# EAGLE board Rapide13 (EAGLE 6.3)
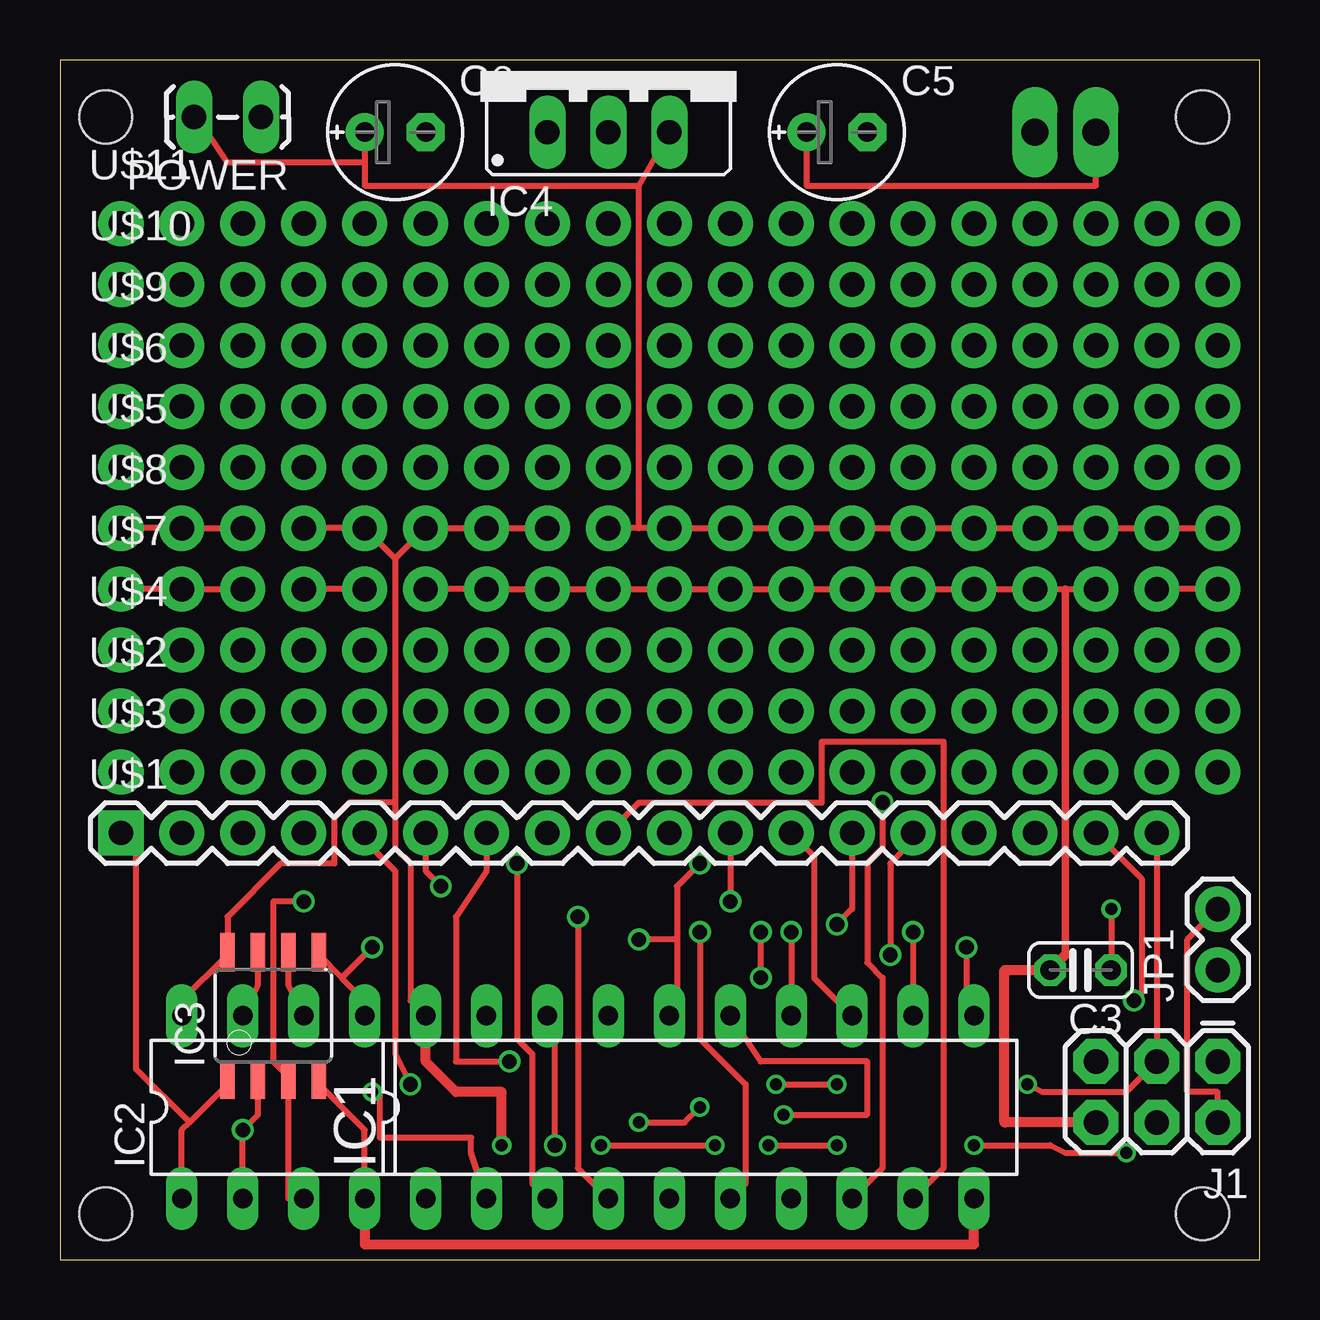
[diagram p0: board, top side]
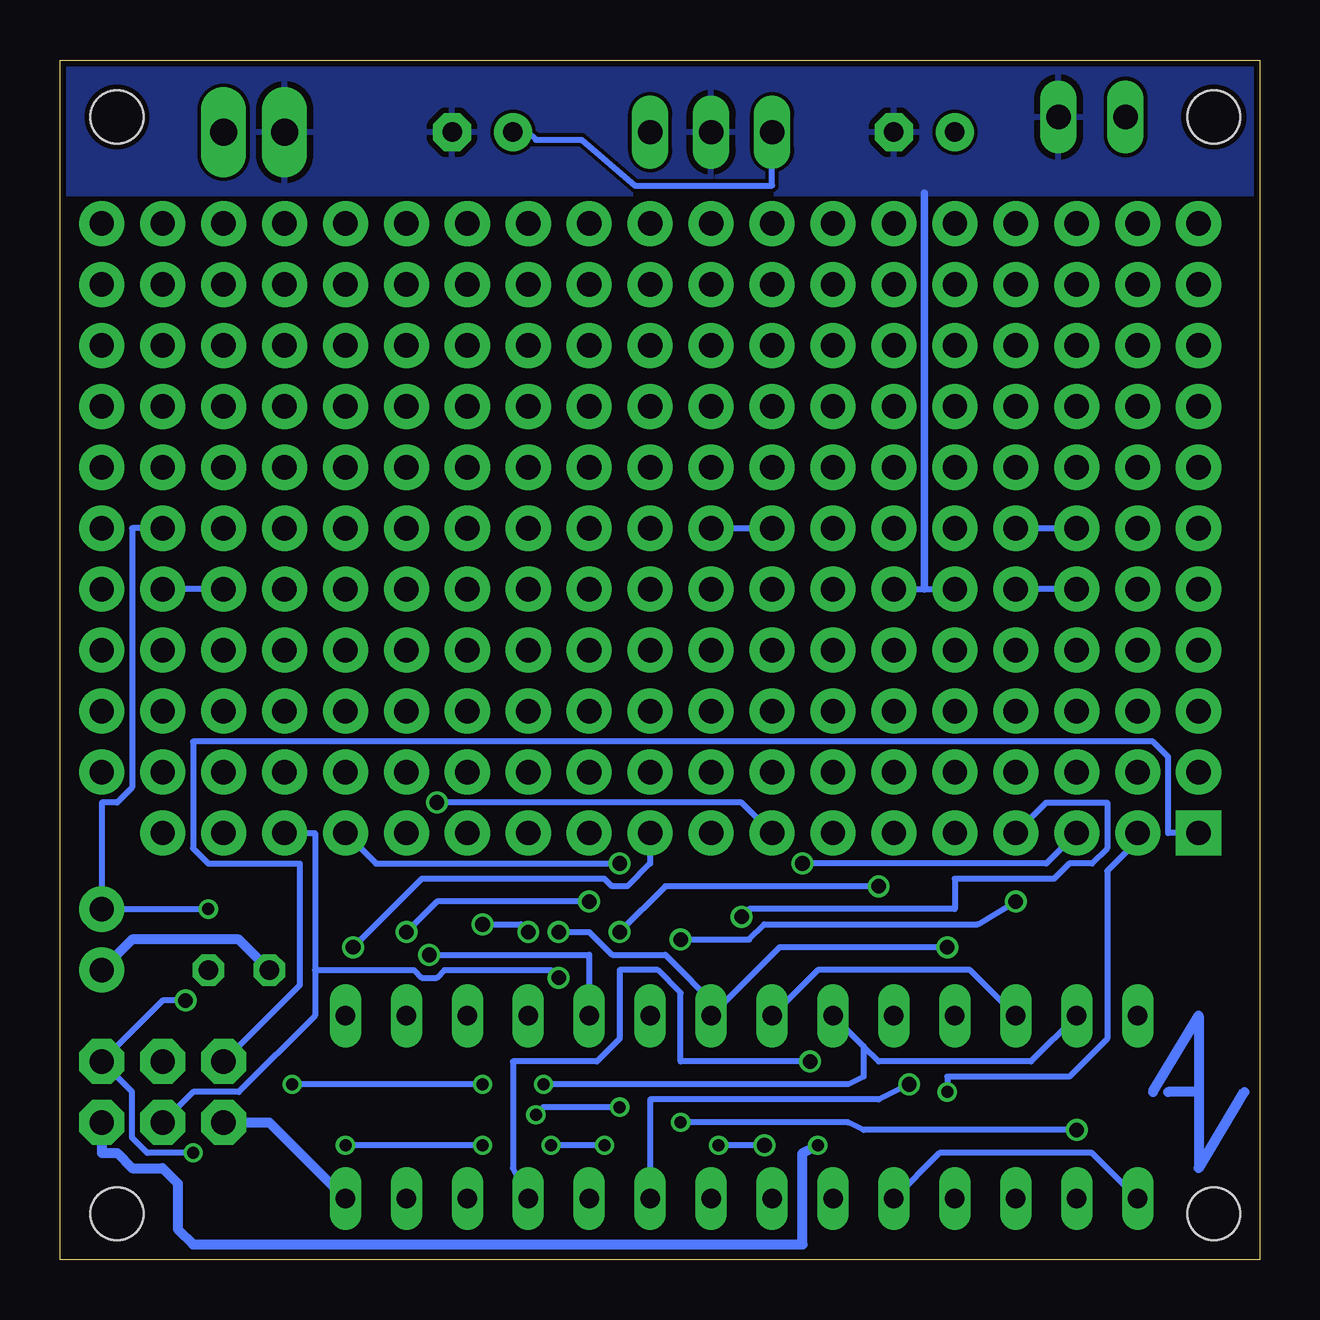
[diagram p1: board, bottom side, seen from below]

Size 50 x 50 mm. Coordinates in mm from the lower left corner, seen from the top.
Outline: 0,0 50,0 50,50 0,50 0,0
Copper layers (1*16): Top 0.035mm / dielectric 1.5mm / Bottom 0.035mm
Design rules "Fusion_eagle_rule_v1.1": minimum track width 6mil, minimum drill 12mil, track to track 6mil, track to pad 6mil, pad to pad 6mil, via to via 6mil, smd to smd 0mil, copper to edge 10mil, drill to drill 10mil, minimum pad ring 10mil, minimum via ring 6mil, stop-mask expansion 2mil, vias tented up to drill 100mil, thermal gap 10mil
Holes 2.2 mm at 1.91,1.91 47.62,1.91 47.62,47.62 1.91,47.62

## Footprints (pad centres in the part's own frame; a part is rotated, then mirrored left to right if it is on the bottom)
C025-024X044 = drill 0.813 octagon: 1 -1.27,0; 2 1.27,0
E2,5-6E = drill 0.813 pad 1.575: + -1.27,0 | drill 0.813 pad 1.575 octagon: - 1.27,0
DIL20 = drill 0.813 long: 1 -11.43,-3.81; 2 -8.89,-3.81; 3 -6.35,-3.81; 4 -3.81,-3.81; 5 -1.27,-3.81; 6 1.27,-3.81; 7 3.81,-3.81; 8 6.35,-3.81; 9 8.89,-3.81; 10 11.43,-3.81; 11 11.43,3.81; 12 8.89,3.81; 13 6.35,3.81; 14 3.81,3.81; 15 1.27,3.81; 16 -1.27,3.81; 17 -3.81,3.81; 18 -6.35,3.81; 19 -8.89,3.81; 20 -11.43,3.81
DIL08 = drill 0.813 long: 1 -3.81,-3.81; 2 -1.27,-3.81; 3 1.27,-3.81; 4 3.81,-3.81; 5 3.81,3.81; 6 1.27,3.81; 7 -1.27,3.81; 8 -3.81,3.81
8S1 = smd 0.6 x 1.6: 1 -1.905,-2.654; 2 -0.645,-2.654; 3 0.625,-2.654; 4 1.895,-2.654; 5 1.905,2.654; 6 0.635,2.654; 7 -0.635,2.654; 8 -1.905,2.654
78XXS = drill 1.016 long: GND 0,-2.54; IN -2.54,-2.54; OUT 2.54,-2.54
2X3 = drill 1.016 pad 1.88 octagon: 1 0,0; 2 0,2.54; 3 2.54,0; 4 2.54,2.54; 5 5.08,0; 6 5.08,2.54
1X02 = drill 1.016 pad 1.88: 1 0,0; 2 2.54,0
1X02_LOCK_LONGPADS = drill 1.016 long: 1 -0.127,0; 2 2.667,0
1X18 = drill 1.016 pad 1.88 square: 1 0,0 | drill 1.016 pad 1.88: 2 2.54,0; 3 5.08,0; 4 7.62,0; 5 10.16,0; 6 12.7,0; 7 15.24,0; 8 17.78,0; 9 20.32,0; 10 22.86,0; 11 25.4,0; 12 27.94,0; 13 30.48,0; 14 33.02,0; 15 35.56,0; 16 38.1,0; 17 40.64,0; 18 43.18,0
1X19_NO_SILK = drill 1.016 pad 1.88: 1 0,0; 2 2.54,0; 3 5.08,0; 4 7.62,0; 5 10.16,0; 6 12.7,0; 7 15.24,0; 8 17.78,0; 9 20.32,0; 10 22.86,0; 11 25.4,0; 12 27.94,0; 13 30.48,0; 14 33.02,0; 15 35.56,0; 16 38.1,0; 17 40.64,0; 18 43.18,0; 19 45.72,0
1X02_LONGPADS = drill 1.118 pad 1.88 long: 1 0,0; 2 2.54,0

## Placement (x,y rotation side)
C3  [C025-024X044]  42.55,12.06 180 top
C5  47u  [E2,5-6E]  32.38,46.99 0 top
C6  4.7u  [E2,5-6E]  13.97,46.99 0 top
IC1  AT90S2313P  [DIL20]  26.67,6.35 0 top
IC2  TINY13-20PU  [DIL08]  8.89,6.35 0 top
IC3  TINY13-20SSU  [8S1]  8.89,10.16 0 top
IC4  [78XXS]  22.86,49.53 0 top
J1  AVR_SPI_PRG_6PTH  [2X3]  48.26,8.26 180 top
JP1  [1X02]  48.26,12.06 90 top
POWER  [1X02_LOCK_LONGPADS]  8.26,47.62 180 top
U$1  M18_  [1X18]  2.54,17.78 0 top
U$2  M191X19_NO_SILK  [1X19_NO_SILK]  2.54,22.86 0 top
U$3  M191X19_NO_SILK  [1X19_NO_SILK]  2.54,20.32 0 top
U$4  M191X19_NO_SILK  [1X19_NO_SILK]  2.54,25.4 0 top
U$5  M191X19_NO_SILK  [1X19_NO_SILK]  2.54,33.02 0 top
U$6  M191X19_NO_SILK  [1X19_NO_SILK]  2.54,35.56 0 top
U$7  M191X19_NO_SILK  [1X19_NO_SILK]  2.54,27.94 0 top
U$8  M191X19_NO_SILK  [1X19_NO_SILK]  2.54,30.48 0 top
U$9  M191X19_NO_SILK  [1X19_NO_SILK]  2.54,38.1 0 top
U$10  M191X19_NO_SILK  [1X19_NO_SILK]  2.54,40.64 0 top
U$11  M191X19_NO_SILK  [1X19_NO_SILK]  2.54,43.18 0 top
UNREGULATED  [1X02_LONGPADS]  40.64,46.99 0 top

## Library data of the parts
C3 C5 C6 = resistor
IC1 = atmel; OC_FARNELL: unknown; OC_NEWARK: unknown
IC2 = atmel; MPN: ATTINY13-20PU; OC_FARNELL: 9171550; OC_NEWARK: 96K6521
IC3 = atmel; MPN: ATTINY13-20SSU; OC_FARNELL: 1455133; OC_NEWARK: 58M3771
IC4 = v-reg
J1 POWER U$1 UNREGULATED = SparkFun
JP1 U$2-U$11 = SparkFun-Connectors

## Nets
GND: C3.2 C5.- C6.- IC1.10 IC2.4 IC3.4 IC4.GND J1.6 JP1.1 POWER.1 U$7.1 U$7.2 U$7.3 U$7.4 U$7.5 U$7.6 U$7.7 U$7.8 U$7.9 U$7.10 U$7.11 U$7.12 U$7.13 U$7.14 U$7.15 U$7.16 U$7.17 U$7.18 U$7.19 UNREGULATED.1
MISO: IC1.18 IC2.6 IC3.6 J1.1 U$1.17
MOSI: IC1.17 IC2.5 IC3.5 J1.4 U$1.16
N$1: IC1.4 U$1.4
N$2: IC1.5 U$1.5
N$3: IC1.2 U$1.2
N$4: IC1.3 U$1.3
N$5: IC1.6 U$1.6
N$6: IC1.7 U$1.7
N$7: IC1.8 U$1.8
N$8: IC1.9 U$1.9
N$9: IC1.11 U$1.10
N$10: IC1.12 U$1.11
N$11: IC1.13 U$1.12
N$12: IC1.14 U$1.13
RESET: IC1.1 IC2.1 IC3.1 J1.5 U$1.1
SCK: IC1.19 IC2.7 IC3.7 J1.3 U$1.18
TINY13_B3: IC1.15 IC2.2 IC3.2 U$1.14
TINY13_B4: IC1.16 IC2.3 IC3.3 U$1.15
VCC: C3.1 C6.+ IC1.20 IC2.8 IC3.8 IC4.OUT J1.2 JP1.2 POWER.2 U$8.1 U$8.2 U$8.3 U$8.4 U$8.5 U$8.6 U$8.7 U$8.8 U$8.9 U$8.10 U$8.11 U$8.12 U$8.13 U$8.14 U$8.15 U$8.16 U$8.17 U$8.18 U$8.19
VIN: C5.+ IC4.IN UNREGULATED.2

## Tracks (layer width: path | path; a pad name or v marks a point on that pad's centre or on a via)
GND
  Top 0.254: U$7.5 U$7.4 | IC2.4 12.7,5.4 10.79,7.3 IC3.4 | U$7.1 U$7.2 U$7.3 | U$7.19 U$7.18 | U$7.6 U$7.7 U$7.8 U$7.9 U$7.10 U$7.11 U$7.12 U$7.13 U$7.14 U$7.15 U$7.16 41.91,27.94 U$7.17
  Top 0.305: 41.91,27.94 41.91,12.7
  Top 0.406: J1.6 39.37,5.71 39.37,12.06 C3.2 41.91,12.7 | IC2.4 12.7,0.64 38.1,0.64 IC1.10
  Bottom 0.254: U$7.3 U$7.4 | U$7.17 U$7.18 | U$7.6 13.97,27.94 U$7.5
  Bottom 0.305: 13.97,27.94 13.97,44.45
  Bottom 0.406: IC1.10 41.27,5.71 J1.6 | JP1.1 46.99,13.34 42.55,13.34 C3.2
  pour Bottom: -1.91,52.07 52.7,52.07 52.7,44.45 -1.91,44.45
MISO  (via drill 0.5, 0.61)
  Top 0.254: IC3.6 9.53,11.43 IC2.6 | v44.77,10.79 45.09,11.11 45.09,15.88 U$1.17 | IC1.18 20.64,9.21 v20.64,4.76 | v22.54,4.76 v27.3,4.76 | v29.53,4.76 v32.38,4.76 | v38.1,4.76 41.27,4.76 41.91,4.45 v44.45,4.45
  Bottom 0.254: IC1.18 18.41,12.06 12.06,12.06 IC2.6 | v44.77,10.79 45.72,10.79 J1.1 46.99,6.99 46.99,5.08 46.35,4.45 v44.45,4.45 | v20.64,4.76 v22.54,4.76 | v27.3,4.76 v29.53,4.76 | v32.38,4.76 v38.1,4.76
MOSI  (via drill 0.61)
  Top 0.254: 11.75,11.75 12.7,10.79 IC2.5 | 11.75,11.75 10.79,12.7 IC3.5 | 11.75,11.75 v13.02,13.02 | v29.21,11.75 v29.21,13.65
  Bottom 0.254: 22.54,10.48 20,13.02 v13.02,13.02 | J1.4 44.45,6.99 42.55,6.99 39.37,10.16 39.37,12.06 | 39.37,12.06 39.37,17.78 U$1.16 | 22.54,10.48 24.77,12.7 26.99,12.7 27.94,13.65 v29.21,13.65 | v29.21,11.75 29.53,12.06 33.97,12.06 34.29,11.75 34.92,11.75 35.24,12.06 39.37,12.06 | 22.54,10.48 IC1.17
N$1  (via drill 0.61)
  Top 0.254: IC1.4 21.59,3.81 v21.59,14.29
  Bottom 0.254: v21.59,14.29 21.27,14.61 12.7,14.61 12.7,15.88 8.57,15.88 7.94,16.51 6.99,16.51 6.35,17.14 6.35,19.05 8.89,19.05 U$1.4
N$2  (via drill 0.61)
  Top 0.254: v14.61,7.3 13.97,8.57 13.97,16.19 12.7,17.46 U$1.5
  Bottom 0.254: IC1.5 25.4,6.67 15.88,6.67 v14.61,7.3
N$3  (via drill 0.5)
  Top 0.254: IC1.2 17.14,4.45 17.14,5.08 13.34,5.08 13.34,6.99 v13.02,6.99
  Bottom 0.254: v13.02,6.99 13.02,7.62 7.94,7.62 6.35,9.21 6.35,16.19 5.08,17.46 U$1.2
N$4  (via drill 0.61)
  Top 0.254: IC1.3 19.68,3.17 19.68,8.57 19.05,9.21 v19.05,16.51
  Bottom 0.254: v19.05,16.51 8.89,16.51 U$1.3
N$5  (via drill 0.61)
  Top 0.254: IC1.6 28.57,3.17 28.57,7.3 26.67,9.21 v26.67,13.65 | v15.88,15.56 15.24,16.19 U$1.6
  Bottom 0.254: v26.67,13.65 24.77,15.56 v15.88,15.56
N$6  (via drill 0.61)
  Top 0.254: v18.73,8.26 16.51,8.26 16.51,14.29 17.78,16.19 U$1.7
  Bottom 0.254: IC1.7 31.11,3.81 31.11,8.26 27.62,8.26 26.67,9.21 26.67,12.06 25.08,12.06 24.13,11.11 24.13,8.26 v18.73,8.26
N$7  (via drill 0.61)
  Top 0.254: IC1.8 34.29,3.81 34.29,11.75 33.66,12.38 33.66,16.51 34.29,17.14 v34.29,19.05
  Bottom 0.254: v34.29,19.05 21.59,19.05 U$1.8
N$8
  Top 0.254: IC1.9 36.83,3.81 36.83,21.59 31.75,21.59 31.75,19.05 24.13,19.05 U$1.9
N$9  (via drill 0.61)
  Top 0.254: IC1.11 37.78,10.48 v37.78,13.02
  Bottom 0.254: v37.78,13.02 34.92,15.88 27.3,15.88 26.99,15.56 26.35,15.56 25.4,16.51 U$1.10
N$10  (via drill 0.61)
  Top 0.254: v35.56,13.65 IC1.12 | U$1.11 v27.94,14.92
  Bottom 0.254: v35.56,13.65 34.29,14.92 v27.94,14.92
N$11
  Top 0.254: IC1.13 31.43,11.75 31.43,16.83 U$1.12
N$12  (via drill 0.61)
  Top 0.254: v30.48,13.65 IC1.14 | v32.38,13.97 33.02,14.61 U$1.13
  Bottom 0.254: v30.48,13.65 30.8,13.97 v32.38,13.97
N$13
  Bottom 0.406: 4.45,6.99 2.54,10.16 2.54,6.99 | 2.54,6.99 2.54,3.81 0.64,6.99 | 2.54,6.99 3.81,6.99
RESET
  Top 0.254: 5.4,5.71 5.08,5.4 IC2.1 | 5.4,5.71 6.99,7.3 IC3.1 | U$1.1 3.17,17.14 3.17,7.94 5.4,5.71
  Bottom 0.254: IC1.1 13.34,4.45 6.99,4.45 IC2.1 | J1.5 40.01,11.43 40.01,16.51 43.81,16.51 44.45,17.14 44.45,21.59 4.45,21.59 3.81,20.95 3.81,17.78 U$1.1
SCK  (via drill 0.5)
  Top 0.254: IC3.7 8.26,11.43 IC2.7 | U$1.18 J1.3 44.45,6.99 40.96,6.99 v40.32,7.3 | v29.84,7.3 v32.38,7.3
  Bottom 0.254: 16.51,8.89 15.88,8.26 9.53,8.26 IC2.7 | IC1.19 16.51,8.89 | 16.51,8.89 16.51,7.62 17.14,7.3 v29.84,7.3 | v32.38,7.3 v40.32,7.3
TINY13_B3  (via drill 0.5, 0.61)
  Top 0.254: IC2.2 v7.62,5.4 8.26,6.03 8.26,7.3 IC3.2 | v34.61,12.7 34.61,16.51 35.56,17.46 U$1.14 | v30.16,6.03 33.66,6.03 33.66,8.26 29.21,8.26 IC1.15 | v24.13,5.71 26.04,5.71 v26.67,6.35
  Bottom 0.254: IC1.15 27.94,12.7 v34.61,12.7 | v7.62,5.4 16.51,5.4 17.14,5.71 v24.13,5.71 | v26.67,6.35 29.84,6.35 v30.16,6.03
TINY13_B4  (via drill 0.61)
  Top 0.254: IC2.3 9.53,2.54 9.53,7.3 IC3.3 9.53,7.62 8.89,8.26 8.89,14.92 v10.16,14.92 | IC1.16 25.72,10.48 25.72,13.34 | 25.72,13.34 25.72,15.56 v26.67,16.51 | 25.72,13.34 v24.13,13.34
  Bottom 0.254: v26.67,16.51 36.83,16.51 U$1.15 | v10.16,14.92 11.75,13.97 20.64,13.97 21.27,13.34 v24.13,13.34
VCC  (via drill 0.5)
  Top 0.254: U$8.1 U$8.2 U$8.3 | IC2.8 5.08,10.79 6.99,12.7 IC3.8 6.99,14.29 9.21,16.51 11.43,16.51 11.43,18.41 12.06,19.05 13.97,19.05 | IC1.20 14.61,10.79 14.61,16.51 13.97,17.14 13.97,19.05 | 13.97,29.21 13.97,19.05 | 13.97,29.21 U$8.5 U$8.4 | 13.97,29.21 U$8.6 U$8.7 U$8.8 | 24.13,44.77 IC4.OUT | 24.13,44.77 12.7,44.77 12.7,45.72 | C6.+ 12.7,45.72 | 12.7,45.72 6.99,45.72 5.71,47.62 POWER.2 | J1.2 48.26,6.99 46.99,6.99 46.99,13.34 JP1.2 | 24.13,30.48 U$8.10 U$8.11 U$8.12 U$8.13 U$8.14 U$8.15 U$8.16 U$8.17 U$8.18 U$8.19 | 24.13,30.48 U$8.9 | 24.13,30.48 24.13,44.77 | v43.81,14.61 C3.1
  Top 0.406: v18.41,4.76 18.41,6.99 16.51,6.99 15.24,8.26 IC1.20
  Bottom 0.254: U$8.4 U$8.3 | U$8.18 46.99,30.48 46.99,19.68 47.62,19.05 48.26,19.05 JP1.2 v43.81,14.61 | U$8.9 U$8.8
  Bottom 0.406: J1.2 48.26,4.45 47.62,4.45 46.99,3.81 45.72,3.81 45.09,3.17 45.09,1.27 44.45,0.64 19.05,0.64 19.05,4.45 v18.41,4.76
VIN
  Top 0.254: UNREGULATED.2 43.18,44.77 31.11,44.77 C5.+
  Bottom 0.254: IC4.IN 20.32,44.77 26.04,44.77 28.26,46.67 30.16,46.67 30.48,46.99 C5.+

## Text on the board
Document: GND | VCC | GND | RAW | v1.0 Mar2013 | + | - | VCC | D0 | D1 | X2 | X1 | D2 | D3 | D4 | D5 | D6 | B0 | B1 | B2 | B3 | B4 | B5 | B6 | B7 | RST | + | GND | + | + | Attiny2313 | Rapide13 | Attiny13 | Attiny13: | B5=>B0,B6=>B1 | GND | GND | B7=>B2
bDocu: http://kalshagar.wikispaces.com/Rapide13